# Altium PCB SMT-PBTS(Altium)v1.4.pcbdoc
Units mil, origin at the board's own origin, x right, y up, seen from the top; angles counter-clockwise.
Board outline 4553.31 x 3372.2 mil, 2 copper layers (Top Layer, Bottom Layer); 91 components, 72 nets, 266 pads, 196 vias.
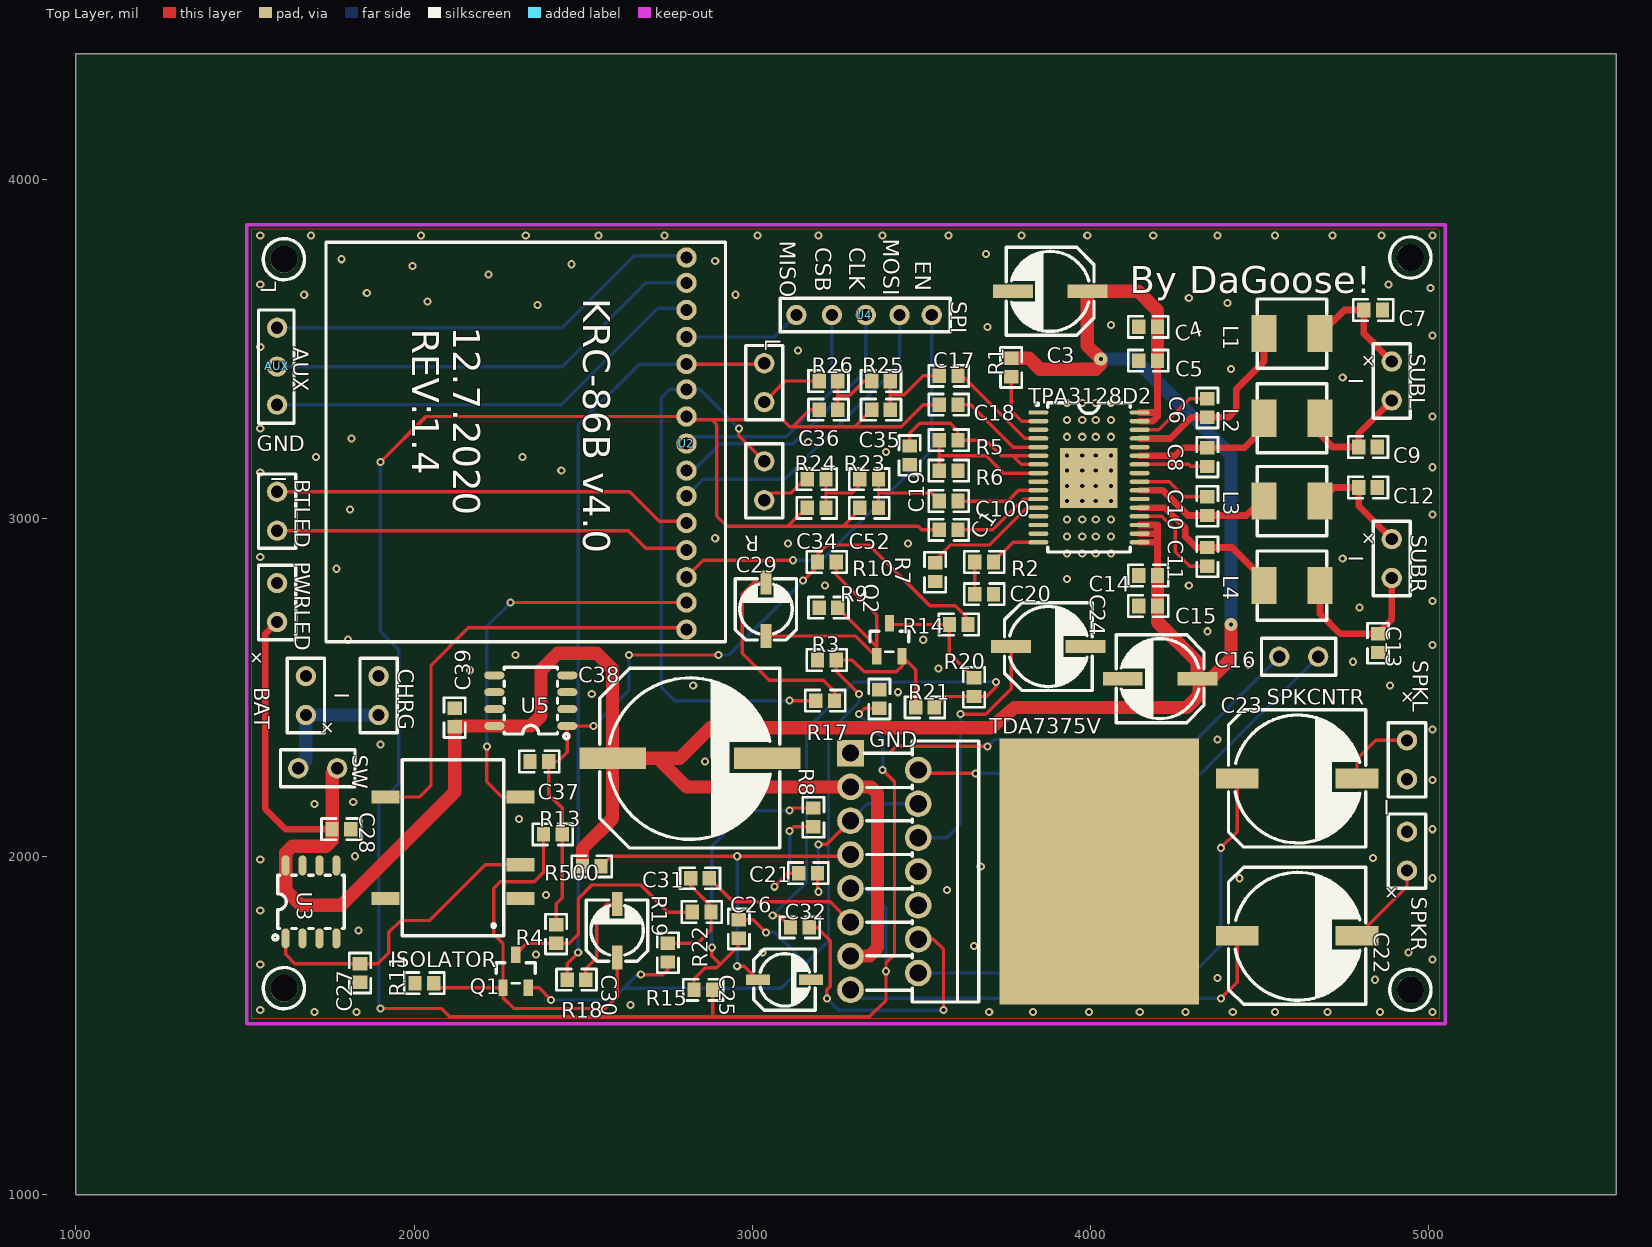
[diagram p0: Top Layer view]
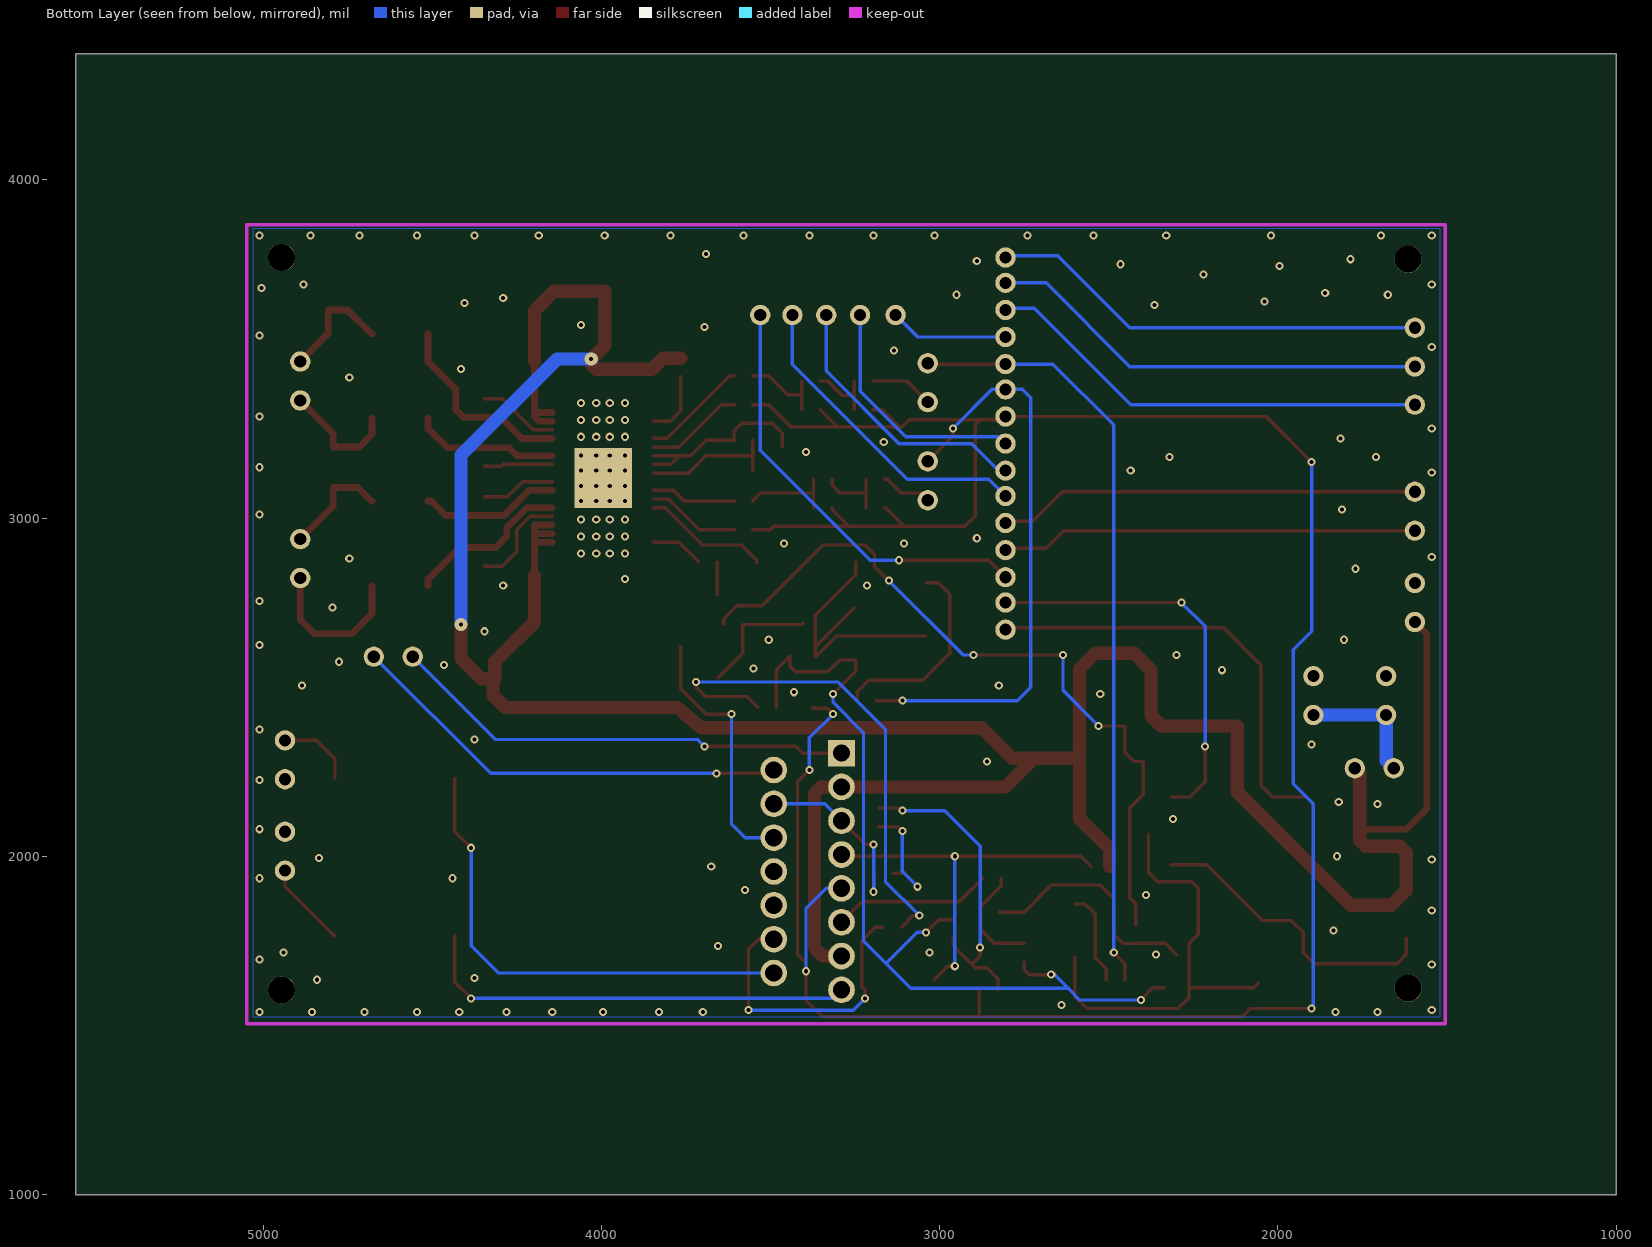
[diagram p1: Bottom Layer view, seen from below]

## Layer stack, top to bottom
Top Layer: signal copper (thickness not stored)
Dielectric: dielectric 12.6, FR-4, Dk 4.8
Bottom Layer: signal copper (thickness not stored)

## Board outline
5553.31,1000 1000,1000 1000,4372.2 5553.31,4372.2

## Components (designator, comment, footprint, x,y, rotation, side; value= is the part's Value field where it differs from the comment)
AUX "CONNECTOR (3)" "CONNECTOR (3)" 1595,3505.2 r270 top
BAT "CONNECTOR (2)" "CONNECTOR (2)" 1680,2475.2 r90 top
BTLED "CONNECTOR (2)" "CONNECTOR (2)" 1595,3020.2 r270 top
C1 "0603" 0603 3580,2965.2 r0 top
C3 "CAP-SMD_BD6.3-L6.6-W6.6-FD" CAP-SMD_BD6.3-L6.6-W6.6-FD 3880,3670.2 r180 top
C4 "0603" 0603 4170,3565.2 r0 top
C5 "0603" 0603 4170,3465.2 r180 top
C6 "0603" 0603 4345,3325.2 r90 top
C7 "0603" 0603 4835,3615.2 r0 top
C8 "0603" 0603 4345,3180.2 r90 top
C9 "0603" 0603 4820,3210.2 r180 top
C10 "0603" 0603 4345,3035.2 r90 top
C11 "0603" 0603 4345,2885.2 r90 top
C12 "0603" 0603 4820,3090.2 r0 top
C13 "0603" 0603 4850,2630.2 r90 top
C14 "0603" 0603 4170,2830.2 r0 top
C15 "0603" 0603 4170,2740.2 r180 top
C16 "CAP-SMD_BD6.3-L6.6-W6.6-FD" CAP-SMD_BD6.3-L6.6-W6.6-FD 4205,2525.2 r180 top
C17 "0603" 0603 3580,3420.2 r0 top
C18 "0603" 0603 3580,3335.2 r0 top
C19 "0603" 0603 3465,3185.2 r90 top
C20 "0603" 0603 3685,2775.2 r0 top
C21 "0603" 0603 3165,1950.2 r180 top
C22 "CAP-SMD_BD10.0-L10.3-W10.3-FD" CAP-SMD_BD10.0-L10.3-W10.3-FD 4610,1765.2 r0 top
C23 "CAP-SMD_BD10.0-L10.3-W10.3-FD" CAP-SMD_BD10.0-L10.3-W10.3-FD 4610,2230.2 r0 top
C24 "CAP-SMD_BD6.3-L6.6-W6.6-FD" CAP-SMD_BD6.3-L6.6-W6.6-FD 3875,2620.2 r0 top
C25 "CAP-SMD_BD4.0-L4.3-W4.3-FD" CAP-SMD_BD4.0-L4.3-W4.3-FD 3095,1635.2 r0 top
C26 "0603" 0603 2960,1785.2 r90 top
C27 "0603" 0603 1840,1655.2 r270 top
C28 "0603" 0603 1785,2080.2 r180 top
C29 "CAP-SMD_BD4.0-L4.3-W4.3-FD" CAP-SMD_BD4.0-L4.3-W4.3-FD 3040,2730.2 r90 top
C30 "CAP-SMD_BD4.0-L4.3-W4.3-FD" CAP-SMD_BD4.0-L4.3-W4.3-FD 2600,1780.2 r90 top
C31 "0603" 0603 2845,1935.2 r0 top
C32 "0603" 0603 3140,1790.2 r0 top
C34 "0603" 0603 3190,3030.2 r0 top
C35 "0603" 0603 3380,3320.2 r0 top
C36 "0603" 0603 3225,3320.2 r0 top
C37 "0603" 0603 2370,2280.2 r0 top
C38 "CAP-SMD_BD12.5-L13.0-W13.0-FD" CAP-SMD_BD12.5-L13.0-W13.0-FD 2815,2290.2 r0 top
C39 "0603" 0603 2120,2410.2 r90 top
C52 "0603" 0603 3345,3030.2 r0 top
C100 "0603" 0603 3580,3050.2 r0 top
CHRG "CONNECTOR (2)" "CONNECTOR (2)" 1895,2475.2 r270 top
GND "0603" 0603 3375,2465.2 r90 top
ISOLATOR "PWRM-TH_B0505XT-1WR3" PWRM-TH_B0505XT-1WR3 2115,2025.2 r90 top
L "CONNECTOR (2)" "CONNECTOR (2)" 3035,3400.2 r90 top
L1 "IND-SMD_L5.2-W5.2_MS0530-XX" IND-SMD_L5.2-W5.2_MS0530-XX 4595,3545.2 r0 top
L2 "IND-SMD_L5.2-W5.2_MS0530-XX" IND-SMD_L5.2-W5.2_MS0530-XX 4595,3295.2 r0 top
L3 "IND-SMD_L5.2-W5.2_MS0530-XX" IND-SMD_L5.2-W5.2_MS0530-XX 4595,3050.2 r0 top
L4 "IND-SMD_L5.2-W5.2_MS0530-XX" IND-SMD_L5.2-W5.2_MS0530-XX 4595,2800.2 r0 top
PWRLED "CONNECTOR (2)" "CONNECTOR (2)" 1595,2750.2 r270 top
Q1 "SOT-23-3_L2.9-W1.3-P1.90-LS2.4-TR" SOT-23-3_L2.9-W1.3-P1.90-LS2.4-TR 2300,1660.2 r270 top
Q2 "SOT-23-3_L2.9-W1.3-P1.90-LS2.4-TR" SOT-23-3_L2.9-W1.3-P1.90-LS2.4-TR 3405,2640.2 r270 top
R "CONNECTOR (2)" "CONNECTOR (2)" 3035,3110.2 r90 top
R1 "0603" 0603 3765,3445.2 r90 top
R2 "0603" 0603 3685,2870.2 r0 top
R3 "0603" 0603 3220,2580.2 r180 top
R4 "0603" 0603 2420,1770.2 r90 top
R5 "0603" 0603 3580,3230.2 r0 top
R6 "0603" 0603 3580,3140.2 r0 top
R7 "0603" 0603 3540,2840.2 r90 top
R8 "0603" 0603 3180,2115.2 r90 top
R9 "0603" 0603 3225,2735.2 r0 top
R10 "0603" 0603 3220,2870.2 r180 top
R11 "0603" 0603 2030,1625.2 r0 top
R13 "0603" 0603 2410,2065.2 r0 top
R14 "0603" 0603 3610,2685.2 r0 top
R15 "0603" 0603 2855,1605.2 r180 top
R17 "0603" 0603 3215,2460.2 r0 top
R18 "0603" 0603 2480,1635.2 r0 top
R19 "0603" 0603 2850,1835.2 r0 top
R20 "0603" 0603 3655,2500.2 r90 top
R21 "0603" 0603 3510,2440.2 r0 top
R22 "0603" 0603 2750,1715.2 r90 top
R23 "0603" 0603 3345,3115.2 r0 top
R24 "0603" 0603 3190,3115.2 r0 top
R25 "0603" 0603 3380,3405.2 r0 top
R26 "0603" 0603 3225,3405.2 r0 top
R500 "0603" 0603 2525,1970.2 r0 top
SPKCNTR "CONNECTOR (2)" "CONNECTOR (2)" 4615,2590.2 r0 top
SPKL "CONNECTOR (2)" "CONNECTOR (2)" 4935,2285.2 r90 top
SPKR "CONNECTOR (2)" "CONNECTOR (2)" 4935,2015.2 r90 top
SUBL "CONNECTOR (2)" "CONNECTOR (2)" 4890,3405.2 r270 top
SUBR "CONNECTOR (2)" "CONNECTOR (2)" 4890,2880.2 r270 top
SW "CONNECTOR (2)" "CONNECTOR (2)" 1715,2260.2 r0 top
TDA7375V "MULTIWATT-15_L19.6-W5.0-P1.27-L" MULTIWATT-15_L19.6-W5.0-P1.27-L 3390,1955.2 r270 top
TPA3128D2 "HTSSOP-32_L11.0-W6.1-P0.65-LS8.1-BL-EP" HTSSOP-32_L11.0-W6.1-P0.65-LS8.1-BL-EP 3995,3120.2 r270 top
U2 "KRC-86B V4.0" "KRC-86B V4.0" 2845,3340.2 r270 top
U3 "SOIC-8_L4.9-W3.9-P1.27-LS6.0-BL" SOIC-8_L4.9-W3.9-P1.27-LS6.0-BL 1695,1865.2 r0 top
U4 "KRC-86B SPI" "KRC-86B SPI" 3285,3550.2 r180 top
U5 "SOIC-8_L4.9-W3.9-P1.27-LS6.0-BL" SOIC-8_L4.9-W3.9-P1.27-LS6.0-BL 2345,2460.2 r90 top

## Footprints (in the part's own frame and the unit in brackets; to place one, negate y for a bottom-side part, rotate by r counter-clockwise, add the part's x,y. Pads: shape width x height; smd on the part's side, far side on the other; paste and mask are expansions set on the pad)
0603 [mm]
  rect 1x1.1 smd: 1(-0.7,0) 2(0.7,0)
  silkscreen extent -1.5,-0.8 1.5,0.8
CAP-SMD_BD4.0-L4.3-W4.3-FD [mil]
  rect 70.86x31.5 smd: 1(-78.74,0) 2(78.74,0)
  silkscreen extent -91,-90 91,91
CAP-SMD_BD6.3-L6.6-W6.6-FD [mm]
  rect 3x1 smd: 1(-2.8,0) 2(2.8,0)
  silkscreen extent -3.3,-3.3 3.3,3.3
CAP-SMD_BD10.0-L10.3-W10.3-FD [mm]
  rect 3.2x1.5 smd: 1(-4.5,0) 2(4.5,0)
  silkscreen extent -5.15,-5.15 5.15,5.15
CAP-SMD_BD12.5-L13.0-W13.0-FD [mm]
  rect 5x1.6 smd: 1(-5.8,0) 2(5.8,0)
  silkscreen extent -6.75,-6.75 6.75,6.75
"CONNECTOR (2)" [mil]
  round 60 hole 36: 1(-57.5,0) 2(57.5,0)
  silkscreen extent -110,-55 110,55
"CONNECTOR (3)" [mil]
  round 60 hole 36: 1(-57.5,0) 2(57.5,0) 3(170,0)
  silkscreen extent -110,-55 225,50
HTSSOP-32_L11.0-W6.1-P0.65-LS8.1-BL-EP [mm]
  oval 0.33x1.497 smd: 1(-4.874,-3.8) 2(-4.224,-3.8) 3(-3.574,-3.8) 4(-2.926,-3.8) 5(-2.276,-3.8) 6(-1.626,-3.8) 7(-0.975,-3.8) 8(-0.325,-3.8) 9(0.325,-3.8) 10(0.975,-3.8) 11(1.626,-3.8) 12(2.276,-3.8) 13(2.926,-3.8) 14(3.574,-3.8) 15(4.224,-3.8) 16(4.874,-3.8) 17(4.874,3.8) 18(4.224,3.8) 19(3.574,3.8) 20(2.926,3.8) 21(2.276,3.8) 22(1.626,3.8) 23(0.975,3.8) 24(0.325,3.8) 25(-0.325,3.8) 26(-0.975,3.8) 27(-1.626,3.8) 28(-2.276,3.8) 29(-2.926,3.8) 30(-3.574,3.8) 31(-4.224,3.8) 32(-4.874,3.8)
  rect 4.5x4.3 smd: 33(0.051,-0.025)
  silkscreen extent -5.61,-3.98 5.6,3.1
IND-SMD_L5.2-W5.2_MS0530-XX [mm]
  rect 1.9x2.79 smd: 1(-2.1,0) 2(2.1,0)
  silkscreen extent -2.6,-2.6 2.6,2.6
"KRC-86B SPI" [mil]
  round 60 hole 36: 1(-245,-50) 4(-150,-50) 5(-50,-50) 6(50,-50) 7(155,-50)
  silkscreen extent -300,-100 202,0
"KRC-86B V4.0" [mil]
  round 60 hole 36: 1(-430,-40) 2(-355,-40) 3(-275,-40) 4(-195,-40) 5(-115,-40) 6(-40,-40) 7(40,-40) 8(120,-40) 9(200,-40) 10(275,-40) 11(355,-40) 12(435,-40) 13(515,-40) 14(590,-40) 15(670,-40)
  silkscreen extent -476,-1106 706,76
MULTIWATT-15_L19.6-W5.0-P1.27-L [mm]
  rect 2x2 hole 1.3: 1(-8.89,-2.54)
  round 2 hole 1.3: 2(-7.62,2.54) 3(-6.35,-2.54) 4(-5.08,2.54) 5(-3.81,-2.54) 6(-2.54,2.54) 7(-1.27,-2.54) 8(0,2.54) 9(1.27,-2.54) 10(2.54,2.54) 11(3.81,-2.54) 12(5.08,2.54) 13(6.35,-2.54) 14(7.62,2.54) 15(8.89,-2.54)
  silkscreen extent -9.8,-1.52 9.8,7.09
PWRM-TH_B0505XT-1WR3 [mm]
  rect 1x2.1 smd: 1(-3.81,-5.08) 2(-1.27,-5.08) 4(3.81,-5.08) 5(3.81,5.08) 8(-3.81,5.08)
  silkscreen extent -6.6,-3.81 6.6,3.81
SOIC-8_L4.9-W3.9-P1.27-LS6.0-BL [mm]
  oval 0.6x1.518 smd: 1(-1.905,-2.74) 2(-0.635,-2.74) 3(0.635,-2.74) 4(1.905,-2.74) 5(1.905,2.74) 6(0.635,2.74) 7(-0.635,2.74) 8(-1.905,2.74)
  silkscreen extent -2.86,-2.86 2.5,2
SOT-23-3_L2.9-W1.3-P1.90-LS2.4-TR [mm]
  rect 1.25x0.7 smd: 1(1.25,0.95) 2(1.25,-0.95) 3(-1.25,0)
  silkscreen extent -0.65,-1.46 0.9,1.46

## Free pads (board coordinates)
  rect 590.55x787.4 smd: 1(4025,1955.2)
  rect 169.29x177.17 smd far side: 33(3994.01,3118.2)
  round 80 hole 80 unplated: ""(1615,1610.2) ""(1615,3765.2) ""(4945,1605.2) ""(4945,3770.2)

## Via types
v1: diameter 24, hole 12, Top Layer to Bottom Layer, 186 vias
v2: diameter 24.02, hole 12, Top Layer to Bottom Layer, 8 vias
v3: diameter 39.37, hole 12, Top Layer to Bottom Layer, 2 vias

## Nets (pads, with @x,y where several pads share a name; then routed paths per layer and width w, separated by ;. In a path a pad name is that pad's centre, name@x,y a point inside that pad or via, vN(x,y) a via of type N, cw(c..) or ccw(c..) an arc to the next point about the centre after c; other vN are vias at no path point)
GND: BAT.2 C3.2 C4.1 C5.2 C7.2 C9.1 C12.2 C13.1 C14.1 C15.2 C16.2 C19.1 C20.2 C24.2 C25.2 C27.2 C28.1 C37.1 C38.2 C39.2 CHRG.1 GND.2 ISOLATOR.1 pad.1 pad.33 PWRLED.1 R3.2 R6.2 R7.1 R9.1 R11.1 SPKL.1 SPKR.2 TDA7375V.8 TPA3128D2.1 TPA3128D2.9 TPA3128D2.13 TPA3128D2.14 TPA3128D2.15 TPA3128D2.22 TPA3128D2.25 TPA3128D2.28 TPA3128D2.33 U3.2 U3.3 U3.6 U3.7 U5.2 U5.3 U5.6 U5.7
  other v1: 1705,1540.2 1830,1540.2 3700,1540.2 3830,1540.2 3995,1540.2 4145,1540.2 4280,1540.2 4420,1540.2 4545,1540.2 4700,1540.2 4855,1540.2 5010,1540.2 1545,1545.2 2640,1560.2 4840,1635.2 4375,1640.2 1545,1680.2 5010,1695.2 2360,1710.2 3030,1715.2 4940,1715.2 3655,1735.2 1835,1780.2 1545,1840.2 2390,1885.2 3575,1900.2 4440,1935.2 5010,1935.2 3675,1970.2 1545,1990.2 4835,1995.2 1825,2000.2 5010,2080.2 2310,2110.2 1705,2155.2 1820,2160.2 5010,2225.2 1900,2330.2 4375,2345.2 5010,2375.2 2825,2505.2 4885,2505.2 2165,2550.2 3550,2555.2 4465,2565.2 4775,2575.2 2300,2595.2 5010,2625.2 1805,2640.2 3505,2640.2 4345,2665.2 4795,2735.2 5010,2755.2 4290,2800.2 3930,2820.2 1770,2850.2 4745,2880.2 1545,2885.2 3930,2895.2 3975,2895.2 4015,2895.2 4060,2895.2 3105,2925.2 3460,2925.2 2890,2940.2 3930,2945.2 3975,2945.2 4015,2945.2 4060,2945.2 3930,2995.2 3975,2995.2 4015,2995.2 4060,2995.2 5010,3010.2 1810,3025.2 3930,3050.2 3975,3050.2 4015,3050.2 4060,3050.2 3930,3095.2 3975,3095.2 4015,3095.2 4060,3095.2 1545,3135.2 2435,3140.2 3930,3140.2 3975,3140.2 4015,3140.2 4060,3140.2 5010,3150.2 1710,3180.2 2320,3180.2 3930,3185.2 3975,3185.2 4015,3185.2 4060,3185.2 3395,3195.2 3165,3225.2 1815,3235.2 3930,3240.2 3975,3240.2 4015,3240.2 4060,3240.2 1545,3265.2 3930,3290.2 3975,3290.2 4015,3290.2 4060,3290.2 5010,3300.2 3930,3340.2 3975,3340.2 4015,3340.2 4060,3340.2 4745,3415.2 4415,3440.2 3135,3495.2 1545,3505.2 5010,3540.2 3695,3565.2 4060,3570.2 2365,3630.2 4405,3635.2 2040,3640.2 4290,3650.2 1675,3660.2 2950,3660.2 1860,3665.2 5005,3680.2 1545,3690.2 4880,3690.2 2220,3720.2 1995,3745.2 2465,3750.2 2890,3760.2 1785,3765.2 3690,3780.2 1545,3835.2 1695,3835.2 2020,3835.2 2330,3835.2 2545,3835.2 2740,3835.2 3015,3835.2 3195,3835.2 3385,3835.2 3580,3835.2 3795,3835.2 3990,3835.2 4185,3835.2 4375,3835.2 4545,3835.2 4715,3835.2 4860,3835.2 5010,3835.2
  other v2: 2860,2280.2 2525,2480.2 3430,2485.2 3215,2800.2
S$67: 
S$69: 
S$1835: C27.1 ISOLATOR.2 U3.1 | length 909.8
  Top Layer w10: U3.1 1620,1710.2 1647.44,1682.76 C27.1 1892.56,1682.76 1925,1715.2 1925,1775.2 1960,1810.2 2045,1810.2 2210,1975.2 ISOLATOR.2
S$1846: ISOLATOR.5 U2.15 | length 1307.1
  Top Layer w10: ISOLATOR.5 2015,2175.2 2050,2210.2 2050,2565.2 2160,2675.2 2800,2675.2 U2.15
S$1848: ISOLATOR.4 U2.14 | length 1197.6
  Top Layer w10: v1(2215,2325.2) 2215,2220.2 2260,2175.2 ISOLATOR.4 ; v1(2285,2750.2) U2.14
  Bottom Layer w10: v1(2215,2325.2) 2215,2680.2 v1(2285,2750.2)
S$1854: U2.4 U4.7 | length 351.9
  Bottom Layer w10: U2.4 3065,3535.2 U4.7
S$1860: U2.10 U4.4 | length 936.5
  Bottom Layer w10: U2.10 2855,3115.2 3095,3115.2 3435,3455.2 U4.4
S$1862: U2.9 U4.5 | length 817.2
  Bottom Layer w10: U2.9 2825,3140.2 2905,3220.2 3120,3220.2 3335,3435.2 U4.5
S$1864: U2.8 U4.6 | length 719.2
  Bottom Layer w10: U2.8 2825,3240.2 3100,3240.2 3235,3375.2 U4.6
S$2534: BAT.1 CHRG.2 SW.1 | length 381.8
  Bottom Layer w39.37: SW.1 1680,2282.7 BAT.1 CHRG.2
S$3305: C23.2 SPKL.2 | length 227.9
  Top Layer w10: C23.2 4787.2,2287.4 4842.5,2342.7 SPKL.2
S$3307: C22.2 SPKR.1 | length 255.4
  Top Layer w10: C22.2 4790,1765.2 4935,1910.2 SPKR.1
S$3855: C37.2 R4.2 R10.2 R13.2 R14.2 U5.1 | length 2246.2
  Top Layer w10: C37.2 2425,2280.2 2452.87,2308.07 U5.1 v1(2530,2385.2) ; C37.2 2397.6,2182.8 2437.6,2142.8 R13.2 2437.6,1877.8 2420,1860.2 R4.2@2420,1797.7 ; v1(2635,2595.2) v2(2900,2595.2) ; v2(3150,2815.2) 3192.5,2857.7 3192.5,2870.2 3192.5,2892.7 3220,2920.2 3345,2920.2 3525,2740.2 3600,2740.2 3637.6,2702.6 R14.2
  Bottom Layer w10: v1(2530,2385.2) 2635,2490.2 v1(2635,2595.2) ; v2(2900,2595.2) 2930,2595.2 v2(3150,2815.2)
S$3863: C30.1 Q1.2 R11.2 R13.1 | length 1306.2
  Top Layer w10: R11.2 2071.76,1611 Q1.2 ; R13.1 2382.4,1952.6 2355,1925.2 2255,1925.2 2235,1905.2 2235,1770.2 2262.6,1742.6 Q1.2 ; C30.1 2600,1585.2 2565,1550.2 2295,1550.2 2262.6,1582.6 Q1.2
S$3876: C22.1 TDA7375V.15 | length 1310.2
  Top Layer w10: v1(4385,1580.2) 4432.8,1628 C22.1
  Bottom Layer w10: TDA7375V.15 3315,1580.2 v1(4385,1580.2)
S$3878: C23.1 TDA7375V.14 | length 1442.9
  Top Layer w10: v1(4385,2025.2) 4432.8,2073 C23.1
  Bottom Layer w10: TDA7375V.14 4305,1655.2 4385,1735.2 v1(4385,2025.2)
S$3900: C26.2 Q1.1 Q2.1 R3.1 R21.1 R22.1 | length 2709.8
  Top Layer w10: Q1.1 2370,1611.2 v1(2405,1575.2) ; v2(2670,1650.2) 2735,1650.2 2750,1665.2 R22.1 ; C26.2@2960,1812.75 3002.45,1812.75 v1(3040,1775.2) ; v1(3315,2480.2) 3247.56,2547.64 R3.1 3295,2580.2 3330,2545.2 3425,2545.2 3442.4,2562.6 Q2.1 3482.44,2550.96 R21.1
  Bottom Layer w10: v1(2405,1575.2) 2585,1575.2 2620,1610.2 ; v2(2670,1650.2) 2660,1650.2 2620,1610.2 ; v1(3040,1775.2) 3066.2,1775.2 3158.1,1683.3 ; v1(3315,2480.2) 3315,2455.2 3225,2365.2 3225,1750.2 3085,1610.2 2620,1610.2
S$3902: Q1.3 R4.1 R19.1 | length 702.6
  Top Layer w10: Q1.3 2333.2,1742.6 R4.1 ; R4.1@2420,1742.2 2457.4,1742.2 2485,1770.2 2485,1875.2 2525,1915.2 2670,1915.2 2750,1835.2 R19.1
S$3945: L.2 R18.1 U2.5 | length 2279.1
  Top Layer w10: R18.1 2452.44,1682.64 v1(2485,1715.2) ; U2.5 3032.5,3455.2 L.2
  Bottom Layer w10: v1(2485,1715.2) 2485,3275.2 2665,3455.2 U2.5
S$3987: C25.1 R500.2 TDA7375V.7 | length 1157.7
  Top Layer w10: R500.2 2582.6,2000.2 v1(2955,2000.2) 3290,2000.2 TDA7375V.7 ; v1(2955,1675.2) 2976.26,1675.2 C25.1
  Bottom Layer w10: v1(2955,1675.2) v1(2955,2000.2)
S$4166: C24.1 TDA7375V.6 | length 772.5
  Top Layer w10: v1(3615,2420.2) 3690,2420.2 3764.76,2494.96 C24.1
  Bottom Layer w10: TDA7375V.6 3575,2055.2 3615,2095.2 v1(3615,2420.2)
S$4169: C31.1 R19.2 R22.2 | length 321.6
  Top Layer w10: R22.2 2837.8,1742.8 2877.6,1782.6 R19.2 2877.6,1852.6 2817.4,1912.8 C31.1
S$4225: C21.1 TDA7375V.4 TDA7375V.5 | length 540.7
  Top Layer w10: C21.1 3192.56,1897.64 v1(3195,1895.2) ; v1(3195,2035.2) 3220,2035.2 TDA7375V.5
  Bottom Layer w10: v1(3195,1895.2) v1(3195,2035.2) ; TDA7375V.5 3340,2155.2 TDA7375V.4
S$4227: C21.2 R8.1 | length 347.8
  Top Layer w10: v1(3065,1910.2) 3105,1950.2 C21.2 ; v1(3110,2075.2) 3122.44,2087.64 R8.1
  Bottom Layer w10: v1(3065,1910.2) 3110,1955.2 v1(3110,2075.2)
S$4229: C32.1 R20.1 R21.2 | length 1498.6
  Top Layer w10: v1(3060,1825.2) 3077.44,1825.2 C32.1 ; R21.2 3569.96,2472.6 R20.1 3692.4,2472.6 3720,2500.2 v1(3720,2515.2)
  Bottom Layer w10: v1(3060,1825.2) 3160,1925.2 3160,2375.2 3300,2515.2 v1(3720,2515.2)
S$4337: C13.2 L4.2 SUBR.2 | length 461.2
  Top Layer w19.68: L4.2 4677.68,2717.52 4737.44,2657.76 C13.2 ; C13.2 4850,2660.2 4890,2700.2 SUBR.2
S$4360: C12.1 L3.2 SUBR.1 | length 324.2
  Top Layer w19.68: L3.2 4680,3050.2 4720,3090.2 C12.1 4792.44,3035.26 SUBR.1
S$4363: C9.2 L2.2 SUBL.2 | length 355.8
  Top Layer w19.68: L2.2 4677.68,3247.52 4715,3210.2 C9.2 4792.44,3250.14 SUBL.2
S$4366: C7.1 L1.2 SUBL.1 | length 345.5
  Top Layer w19.68: L1.2 4680,3545.2 4750,3615.2 C7.1 4807.44,3545.26 SUBL.1
S$4454: Q2.3 R14.1 R20.2 | length 366.7
  Top Layer w10: Q2.3 3409.2,2685.2 R14.1 3582.4,2600.3 R20.2@3655,2527.7
S$4458: C29.1 Q2.2 R9.2 R10.1 | length 873.4
  Top Layer w10: C29.1 3303.74,2651.46 3364.2,2591 Q2.2 ; R10.1 3247.56,2832.64 3367.6,2712.6 Q2.2 ; R9.2 3367.6,2620.16 Q2.2
S$4468: R17.1 R.2 U2.6 | length 1745.6
  Top Layer w10: v2(2960,3265.2) 2960,3242.7 R.2 ; v1(3110,2460.2) R17.1
  Bottom Layer w10: v2(2960,3265.2) 2845,3380.2 U2.6 2755,3380.2 2730,3355.2 2730,2500.2 2770,2460.2 v1(3110,2460.2)
S$4727: C11.2 L4.1 TPA3128D2.21 | length 488.2
  Top Layer w19.68: TPA3128D2.21 4219.6,3030.6 4280,2970.2 4280,2945.2 4310,2915.2 4312.45,2912.75 4345,2912.75 4417.45,2912.75 4512.32,2817.88 L4.1
S$4729: C11.1 TPA3128D2.20 | length 299.6
  Top Layer w10: TPA3128D2.20 4210.2,3005 4250,2965.2 4250,2900.08 4292.44,2857.64 C11.1
S$4732: C10.1 L3.1 TPA3128D2.23 | length 416.1
  Top Layer w19.68: TPA3128D2.23 4213.3,3081.8 4287.4,3007.6 C10.1 ; C10.1 4460,3007.64 4502.56,3050.2 L3.1
S$4734: C10.2 TPA3128D2.24 | length 218.9
  Top Layer w10: TPA3128D2.24 4232.8,3107.4 4277.45,3062.75 C10.2@4345,3062.75
S$4736: C8.2 L2.1 TPA3128D2.27 | length 431.3
  Top Layer w19.68: TPA3128D2.27 4248.9,3184.2 4272.5,3207.7 C8.2@4345,3207.7 ; C8.2@4345,3207.75 4455,3207.75 4512.32,3265.07 L2.1
S$4738: C6.2 TPA3128D2.30 | length 238.4
  Top Layer w10: TPA3128D2.30 4200.7,3260.9 4290,3350.2 4292.55,3352.75 C6.2@4345,3352.75
S$4741: C8.1 TPA3128D2.26 | length 202.9
  Top Layer w10: TPA3128D2.26 4290,3158.6 4295.96,3152.64 C8.1
S$4744: C6.1 L1.1 TPA3128D2.29 | length 579.6
  Top Layer w19.68: TPA3128D2.29 4235.2,3235.4 4297.44,3297.64 C6.1 4407.44,3297.64 4430,3320.2 4430,3380.2 4512.32,3462.52 L1.1
S$4761: SPKCNTR.1 TDA7375V.1 | length 1385.6
  Top Layer w10: TDA7375V.1 3405,2305.2 3425,2325.2 v1(3695,2325.2)
  Bottom Layer w10: v1(3695,2325.2) 3715,2345.2 4312.5,2345.2 SPKCNTR.1
S$4763: SPKCNTR.2 TDA7375V.2 | length 1329.5
  Top Layer w10: TDA7375V.2 3500,2245.2 v1(3660,2245.2)
  Bottom Layer w10: v1(3660,2245.2) 4327.5,2245.2 SPKCNTR.2
S$4794: C17.2 TPA3128D2.4 | length 314.4
  Top Layer w10: C17.2 3620,3420.2 3804.8,3235.4 TPA3128D2.4
S$4796: C18.2 TPA3128D2.5 | length 289.8
  Top Layer w10: C18.2 3645,3335.2 3770.4,3209.8 TPA3128D2.5
S$4798: C19.2 R5.2 TPA3128D2.6 TPA3128D2.7 | length 573
  Top Layer w10: C19.2@3465,3212.7 3465,3250.2 3495,3280.2 3585,3280.2 3607.6,3257.6 R5.2 ; R5.2 3690,3230.2 3736,3184.2 TPA3128D2.6 ; 3769.14,3184.2 3794.74,3158.6 TPA3128D2.7
S$4820: R5.1 R6.1 TPA3128D2.8 | length 404
  Top Layer w10: R6.1 R5.1 ; 3552.44,3183.72 3691.48,3183.72 3742.2,3133 TPA3128D2.8
S$4831: C36.2 R25.1 R26.2 | length 202.6
  Top Layer w10: C36.2 R26.2 ; 3252.56,3362.3 3287.1,3362.3 3330,3405.2 R25.1
S$4869: C17.1 C35.2 R25.2 | length 253.1
  Top Layer w10: C35.2 R25.2 ; 3407.56,3364.23 3449.04,3364.23 3505,3420.2 C17.1
S$4877: C100.2 TPA3128D2.10 | length 250.9
  Top Layer w10: C100.2 3755,3050.2 3786.6,3081.8 TPA3128D2.10
S$4879: C1.2 TPA3128D2.11 | length 275.5
  Top Layer w10: C1.2 3710,2965.2 3801,3056.2 TPA3128D2.11
S$4951: R24.1 R.1 | length 153.3
  Top Layer w10: R.1 3056.18,3073.88 3113.68,3073.88 3155,3115.2 R24.1
S$4953: C34.2 R23.1 R24.2 | length 212.3
  Top Layer w10: C34.2 R24.2 ; 3217.56,3073.88 3293.68,3073.88 3317.44,3097.64 R23.1
S$4955: C52.2 C100.1 R23.2 | length 275.4
  Top Layer w10: C52.2 R23.2 ; 3372.56,3073.88 3530,3073.88 3552.44,3051.44 C100.1
S$4992: C31.2 TDA7375V.11 | length 471.3
  Top Layer w10: C31.2 2942.56,1865.2 3230,1865.2 TDA7375V.11
S$5031: U2.13 U4.1 | length 1280.3
  Top Layer w10: U2.13 2855,2875.2 v1(3120,2875.2)
  Bottom Layer w10: v1(3120,2875.2) 3205,2875.2 3530,3200.2 U4.1
S$5157: C20.1 R2.1 | length 95
  Top Layer w10: C20.1 R2.1
S$5159: R2.2 TPA3128D2.16 | length 156.9
  Top Layer w10: R2.2 3770.66,2928.3 TPA3128D2.16
S$5162: R7.2 TPA3128D2.12 | length 377.3
  Top Layer w10: R7.2@3540,2867.7 3540,2875.2 3585,2920.2 3700,2920.2 3810.4,3030.6 TPA3128D2.12
S$5174: AUX.1 U2.1 | length 1300.1
  Bottom Layer w10: AUX.1 2437.5,3562.7 2650,3775.2 2800,3775.2 U2.1
S$5176: AUX.2 U2.2 | length 1312.5
  Bottom Layer w10: AUX.2 2437.5,3447.7 2685,3695.2 U2.2
S$5178: AUX.3 U2.3 | length 1330.1
  Bottom Layer w10: AUX.3 2435,3335.2 2720,3620.2 2800,3620.2 U2.3
S$5187: BTLED.2 U2.12 | length 1233.8
  Top Layer w10: BTLED.2 2632.5,2962.7 2685,2910.2 2800,2910.2 U2.12
S$5189: BTLED.1 U2.11 | length 1248.3
  Top Layer w10: BTLED.1 2637.5,3077.7 2725,2990.2 2800,2990.2 U2.11
S$5344: C3.1 C4.2 C5.1 C14.2 C15.1 C16.1 C28.2 C38.1 C39.1 PWRLED.2 R1.2 R500.1 SW.2 TDA7375V.3 TDA7375V.13 TPA3128D2.17 TPA3128D2.18 TPA3128D2.19 TPA3128D2.31 TPA3128D2.32 U3.8 U5.8 | length 9548.7
  Top Layer w19.68: PWRLED.2 1560,2657.7 1560,2140.2 1620,2080.2 C28.2@1757.5,2080.2 ; TPA3128D2.17 4197.6,2928.3 ; TPA3128D2.18 4197.6,2953.9 ; TPA3128D2.19 4197.6,2979.5 C14.2 ; TPA3128D2.31 4183.7,3286.5 4197.56,3300.36 4197.56,3312.1 ; TPA3128D2.32 4197.56,3312.1 ; C5.1 4197.56,3312.1
  Top Layer w39.37: C28.2@1757.45,2080.2 1757.45,2245.15 SW.2 ; C28.2@1757.5,2080.2 1757.5,2047.7 1740,2030.2 1640,2030.2 1620,2010.2 U3.8 1620,1900.2 1665,1855.2 1785,1855.2 2120,2190.2 C39.1 ; C39.1 2122.56,2385.2 U5.8 2345,2385.2 2375,2415.2 2375,2550.2 2425,2600.2 2540,2600.2 2586.65,2553.55 2586.65,2290.2 2586.65,2111.85 2497.44,2022.64 R500.1 ; C38.1 2720,2290.2 ; 2780,2290.2 2720,2290.2 ; 2784.8,2290.2 2875,2380.2 3255,2380.2 3705,2380.2 3774.8,2440.2 4284.8,2440.2 4320,2475.4 C16.1@4320,2525.2 ; TDA7375V.13 3345,1705.2 3370,1730.2 3370,2185.2 3350,2205.2 TDA7375V.3 2805,2205.2 2720,2290.2 ; R1.2 3817.6,3472.8 3850.1,3440.2 4015,3440.2 4030,3455.2 v3(4030,3470.2) 3990.24,3509.96 C3.1 ; C3.1 4140.1,3670.2 4197.56,3612.74 C4.2 C5.1 ; C14.2 C15.1 4197.56,2692.64 4315.24,2574.96 C16.1 4355,2525.2 4415,2585.2 v3(4415,2685.2)
  Bottom Layer w39.37: v3(4030,3470.2) 4130,3470.2 4415,3185.2 v3(4415,2685.2)
S$5469: C32.2 TDA7375V.12 | length 880.1
  Top Layer w10: C32.2@3167.5,1790.2 3190,1790.2 3230,1750.2 3230,1615.2 3220,1605.2 v1(3220,1580.2) ; TDA7375V.12 3535,1755.2 3565,1725.2 v1(3565,1545.2)
  Bottom Layer w10: v1(3220,1580.2) 3255,1545.2 v1(3565,1545.2)
S$5587: C1.1 C18.1 C34.1 C35.1 C36.1 C52.1 GND.1 R15.1 TDA7375V.9 U2.7 | length 7595.5
  Top Layer w10: v1(1900,1550.2) 2080,1550.2 2105,1525.2 3345,1525.2 3395,1575.2 v1(3395,1660.2) 3395,1685.2 3420,1710.2 3420,2220.2 v1(3385,2255.2) ; v1(1900,3165.2) 2035,3300.2 U2.7 2805,3290.2 3090,3290.2 3110,3270.2 3440,3270.2 3505,3335.2 C18.1 ; 2880,3290.2 2895,3275.2 2895,3005.2 2925,2975.2 3490,2975.2 3500,2965.2 C1.1 ; 2882.56,1525.2 R15.1 ; 3104.8,2975.2 3159.8,3030.2 C34.1 ; 3119.49,3270.2 3169.49,3320.2 C36.1 ; 3268,2975.2 3317.4,3024.7 C52.1 ; 3302.5,3270.2 C35.1 ; v1(3315,2420.2) 3332.44,2437.64 GND.1
  Bottom Layer w10: v1(1900,1550.2) 1895,1555.2 1895,2155.2 1955,2215.2 1955,2610.2 1900,2665.2 v1(1900,3165.2) ; TDA7375V.9 3335,1905.2 3395,1845.2 v1(3395,1660.2) ; v1(3315,2420.2) 3385,2350.2 v1(3385,2255.2)
S$5655: C26.1 R8.2 R15.2 | length 934.6
  Top Layer w10: R15.2@2827.45,1605.2 2827.45,1637.65 2860,1670.2 2895,1670.2 2960,1735.2 C26.1 ; v1(2880,1730.2) 2880,1705.86 2905.33,1680.53 ; v1(3110,2135.2) 3117.55,2142.75 R8.2@3180,2142.75
  Bottom Layer w10: v1(2880,1730.2) 2880,2030.2 2985,2135.2 v1(3110,2135.2)
S$6498: R1.1 TPA3128D2.2 | length 193.2
  Top Layer w10: R1.1 3765,3317.8 3796.3,3286.5 TPA3128D2.2
S$9083: L.1 R26.1 | length 188.3
  Top Layer w10: L.1 3097.5,3405.2 R26.1
S$9276: C29.2 R17.2 | length 607.6
  Top Layer w10: C29.2 3003.7,2808.9 2970,2775.2 2970,2600.2 3050,2520.2 3210,2520.2 3245,2485.2 3242.6,2482.8 R17.2
S$9469: C30.2 R18.2 | length 280.3
  Top Layer w10: R18.2 2507.56,1667.76 2540,1700.2 2540,1830.2 2568.74,1858.94 C30.2
pads on no net: ISOLATOR.8 TDA7375V.10 TPA3128D2.3 U3.4 U3.5 U5.4 U5.5

## Polygon pours and split planes (outlines as drawn)
GND on Top Layer (solid): 1520,3855.2 5025,3855.2 5030,3850.2 5030,1520.2 4160,1520.2 3285,1520.2 1525,1520.2 1520,1520.2 1520,1530.2
GND on Bottom Layer (solid): 1520,3855.2 5030,3855.2 5030,1525.2 1520,1525.2

## Silkscreen, mask and mechanical layers (free items; w line width, h text height)
Top Overlay:
  circle w10: c4945,1605.2 r61.03
  circle w10: c4945,3770.2 r61.03
  circle w10: c1615,1610.2 r61.03
  circle w10: c1615,3765.2 r61.03
  text "L" at 1592.5,3665.2 h45 r90
  text "By DaGoose!" at 4115,3665.2 h80
  text "SPI" at 3587.5,3640.2 h45 r270
  text "12.7.2020" at 2115,3565.2 h80 r270
  text "REV:1.4" at 1995,3560.2 h80 r270
  text "AUX" at 1642.5,3505.2 h45 r270
  text "+" at 4789.09,3469.29 h45 r315
  text "−" at 4755,3365.2 h86.61
  text "GND" at 1535,3197.7 h45
  text "−" at 1630,3155.2 h86.61 r180
  text "+" at 4789.09,2944.29 h45 r315
  text "−" at 4755,2840.2 h86.61
  text "+" at 1565.91,2581.11 h45 r135
  text "−" at 1815,2515.2 h86.61 r180
  text "+" at 4930.91,2439.29 h45 r45
  text "+" at 1749.09,2411.11 h45 r225
  text "−" at 4915,2115.2 h86.61 r90
  text "+" at 4920.91,1886.11 h45 r135
Document:
  lines w0.1: 3275.65,2685.1 3277.65,2687.1

## Text inside footprints (layer, text, board x,y; h text height)
U2: Top Overlay "KRC-86B v4.0" at 2500,3650.2 h80 r270
U4: Top Overlay "MISO" at 3081.38,3820.2 h47.24 r270; Top Overlay "CSB" at 3186.38,3800.2 h47.24 r270; Top Overlay "CLK" at 3286.38,3800.2 h47.24 r270; Top Overlay "MOSI" at 3386.38,3825.2 h47.24 r270; Top Overlay "EN" at 3481.38,3760.2 h47.24 r270